# EAGLE board The Flying Jalapeno DUMMY v01 (EAGLE 7.3.0)
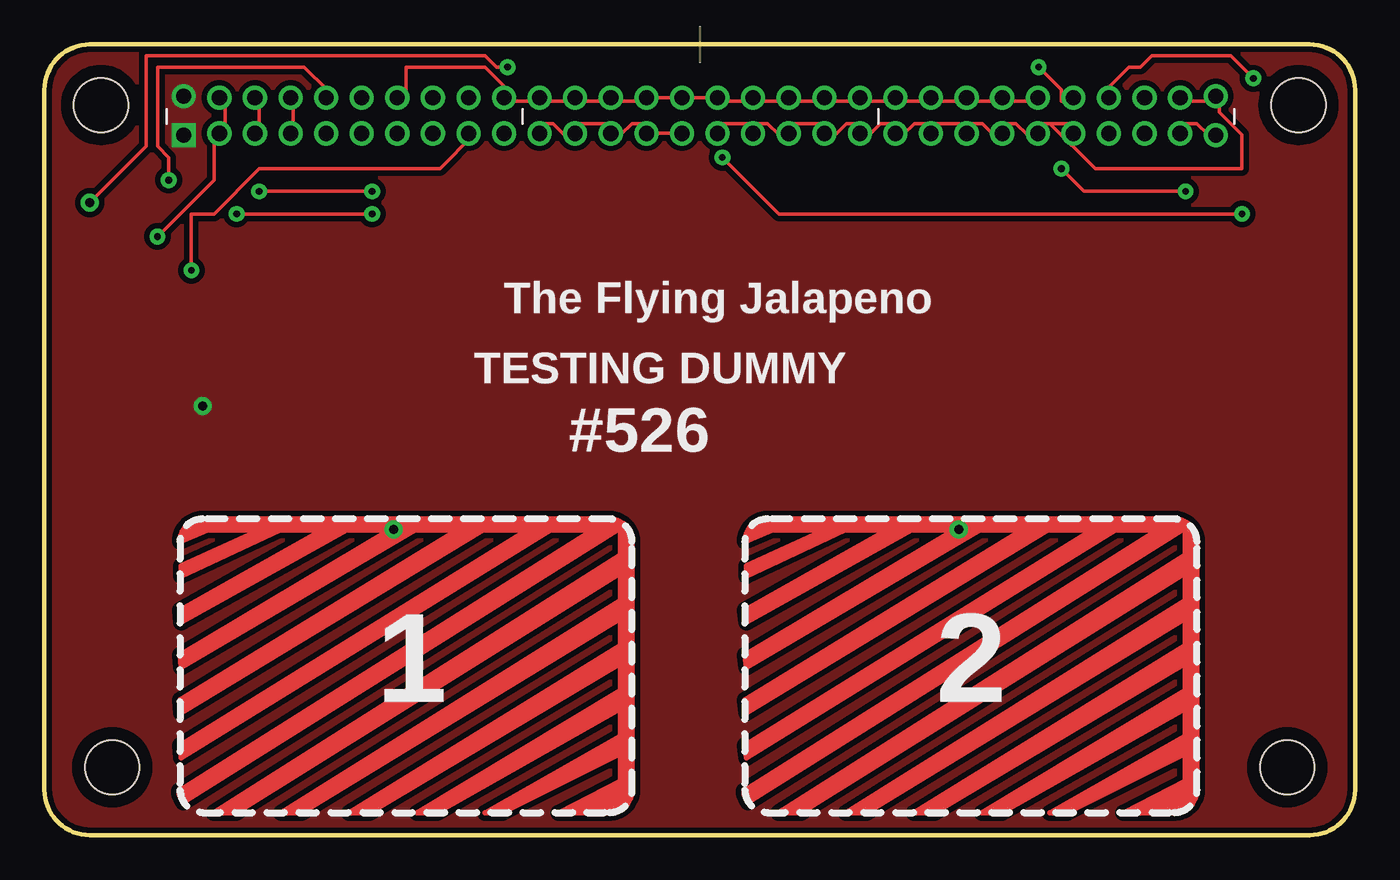
[diagram p0: board, top side]
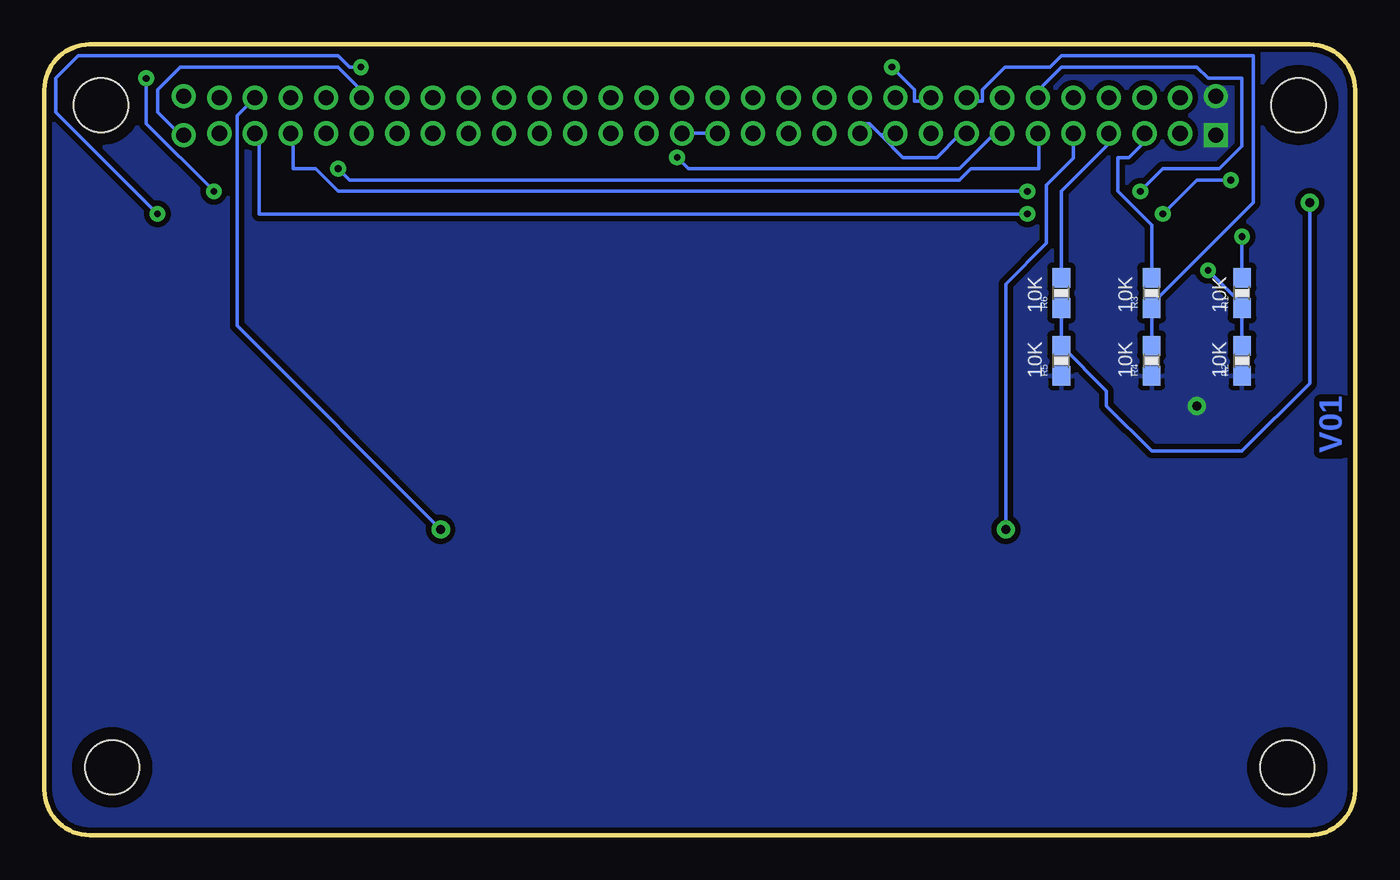
[diagram p1: board, bottom side, seen from below]

Size 73.66 x 44.45 mm. Coordinates in mm from the lower left corner, seen from the top.
Outline: 0,41.91 0,2.54 arc90 2.54,0 71.12,0 arc90 73.66,2.54 73.66,41.91 arc90 71.12,44.45 2.54,44.45 arc90 0,41.91
Copper layers (1*16): Top 0.035mm / dielectric 1.5mm / Bottom 0.035mm
Design rules "SparkFun *": minimum track width 7mil, minimum drill 15mil, track to track 8mil, track to pad 8mil, pad to pad 8mil, via to via 8mil, smd to smd 8mil, copper to edge 8mil, drill to drill 8mil, minimum pad ring 10mil, minimum via ring 10mil, stop-mask expansion 4mil, vias tented up to drill 20mil, thermal gap 10mil
Net classes: 0 default: width 0.203 mm; 8 8_mil: width 0.203 mm, drill 0.381 mm; 9 10_mil: width 0.254 mm, drill 0.381 mm; 10 12_mil: width 0.305 mm, drill 0.381 mm; 11 15_mil: width 0.381 mm, drill 0.381 mm; 12 18_mil: width 0.457 mm, drill 0.508 mm; 13 20_mil: width 0.508 mm, drill 0.508 mm; 14 30_mil: width 0.762 mm, drill 0.508 mm

## Footprints (pad centres in the part's own frame; a part is rotated, then mirrored left to right if it is on the bottom)
CAPSENSE_BUTTON_PADS_ONLY = drill 0.508: CAPSENSE_PAD -0.686,7.036
FLYING_JALAPENO_V2_M = drill 0.85 square: 1 -29,-5.1 | drill 0.85: 2 -27,-5; 3 -25,-5; 4 -23,-5; 5 -21,-5; 6 -19,-5; 7 -17,-5; 8 -15,-5; 9 -13,-5; 10 -11,-5; 11 -9,-5; 12 -7,-5; 13 -5,-5; 14 -3,-5; 15 -1,-5; 16 1,-5; 17 3,-5; 18 5,-5; 19 7,-5; 20 9,-5; 21 11,-5; 22 13,-5; 23 15,-5; 24 17,-5; 25 19,-5; 26 21,-5; 27 23,-5; 28 25,-5; 29 27,-5; 30 29,-5.1; 31 -29,-2.9; 32 -27,-3; 33 -25,-3; 34 -23,-3; 35 -21,-3; 36 -19,-3; 37 -17,-3; 38 -15,-3; 39 -13,-3; 40 -11,-3; 41 -9,-3; 42 -7,-3; 43 -5,-3; 44 -3,-3; 45 -1,-3; 46 1,-3; 47 3,-3; 48 5,-3; 49 7,-3; 50 9,-3; 51 11,-3; 52 13,-3; 53 15,-3; 54 17,-3; 55 19,-3; 56 21,-3; 57 23,-3; 58 25,-3; 59 27,-3; 60 29,-2.9 | hole 3.048: 33.655,-3.404; -33.655,-3.404
0603-RES = smd 1.1 x 1: 1 -0.85,0; 2 0.85,0
STAND-OFF-TIGHT = hole 3.048: 0,0

## Placement (x,y rotation side)
CS1  CAPSENSE_BUTTON_PAD_ONLY  [CAPSENSE_BUTTON_PADS_ONLY]  20.32,10.16 0 top
CS2  CAPSENSE_BUTTON_PAD_ONLY  [CAPSENSE_BUTTON_PADS_ONLY]  52.07,10.16 0 top
JP6  FLYING_JALAPENO_V2MALE  [FLYING_JALAPENO_V2_M]  36.83,44.45 0 top
R1  10K  [0603-RES]  6.35,30.48 90 bottom
R2  10K  [0603-RES]  6.35,26.67 90 bottom
R3  10K  [0603-RES]  11.43,30.48 90 bottom
R4  10K  [0603-RES]  11.43,26.67 90 bottom
R5  10K  [0603-RES]  16.51,26.67 90 bottom
R6  10K  [0603-RES]  16.51,30.48 90 bottom
STANDOFF1  STAND-OFFTIGHT  [STAND-OFF-TIGHT]  3.81,3.81 0 top
STANDOFF2  STAND-OFFTIGHT  [STAND-OFF-TIGHT]  69.85,3.81 0 top

## Library data of the parts
CS1 CS2 JP6 = SparkFun
R1-R6 = SparkFun-Resistors; PROD_ID: RES-00824
STANDOFF1 STANDOFF2 = SparkFun-Electromechanical

## Nets
GND: JP6.1 JP6.31 R2.1 R4.1 R5.1
N$1: JP6.39 R5.2 R6.1
N$2: JP6.4 JP6.34 R6.2
N$3: CS2.CAPSENSE_PAD JP6.58
N$4: CS1.CAPSENSE_PAD JP6.5
N$5: JP6.2 JP6.32 R1.2
N$6: JP6.9 R1.1 R2.2
N$7: JP6.3 JP6.33 R3.2
N$8: JP6.38 R3.1 R4.2
N$9: JP6.28 JP6.35
N$10: JP6.6 JP6.57
N$11: JP6.27 JP6.36
N$12: JP6.7 JP6.56
NET1: JP6.29 JP6.30 JP6.37 JP6.40 JP6.41 JP6.42 JP6.43 JP6.44 JP6.45 JP6.46 JP6.47 JP6.48 JP6.49 JP6.50 JP6.51 JP6.52 JP6.53 JP6.54 JP6.55
NET2: JP6.8 JP6.10 JP6.11 JP6.12 JP6.13 JP6.14 JP6.15 JP6.16 JP6.17 JP6.18 JP6.19 JP6.20 JP6.21 JP6.22 JP6.23 JP6.24 JP6.25 JP6.26 JP6.59 JP6.60

## Tracks (layer width: path | path; a pad name or v marks a point on that pad's centre or on a via)
GND  (via drill 0.51)
  other vias: 8.89,24.13
  pour Bottom (isolate 0.305): 0,0 73.66,0 73.66,44.45 0,44.45
  pour Top (isolate 0.305): 0,0 0,44.45 73.66,44.45 73.66,0
N$1  (via drill 0.38, 0.51)
  Top 0.203: v26.04,43.18 25.4,43.18 24.77,43.82 5.71,43.82 5.71,38.73 v2.54,35.56
  Bottom 0.203: R6.1 R5.2 13.97,24.98 13.97,24.13 11.43,21.59 6.35,21.59 2.54,25.4 v2.54,35.56 | v26.04,43.18 24.77,41.91 24.77,41.28 24.13,41.28 JP6.39
N$2
  Top 0.203: JP6.34 13.97,41.28 13.97,40.01 JP6.4
  Bottom 0.203: R6.2 16.51,36.2 13.34,39.37 JP6.4
N$3
  Bottom 0.203: JP6.58 62.84,40.44 62.84,28.65 CS2.CAPSENSE_PAD
N$4
  Bottom 0.203: JP6.5 15.83,38.07 17.35,36.55 17.35,33.27 19.63,30.99 CS1.CAPSENSE_PAD
N$5  (via drill 0.38)
  Top 0.203: v6.35,33.66 9.53,36.83 9.53,39.37 JP6.2 10.16,40.01 10.16,41.28 JP6.32
  Bottom 0.203: v6.35,33.66 R1.2
N$6  (via drill 0.38)
  Top 0.203: v8.26,31.75 8.26,34.93 9.53,34.93 12.06,37.47 22.23,37.47 24.13,39.37 JP6.9
  Bottom 0.203: R2.2 R1.1 6.35,29.85 v8.26,31.75
N$7
  Top 0.203: JP6.33 12.06,41.28 12.06,40.01 JP6.3
  Bottom 0.203: R3.2 11.43,34.29 13.34,36.2 13.34,38.1 12.7,38.1 11.43,39.37 JP6.3
N$8
  Bottom 0.203: R4.2 R3.1 11.43,29.85 5.71,35.56 5.71,43.82 16.51,43.82 17.14,43.18 19.68,43.18 20.95,41.91 20.95,41.28 21.59,41.28 JP6.38
N$9  (via drill 0.38)
  Top 0.203: v10.79,34.93 v18.41,34.93 | v6.99,36.83 6.99,38.1 6.35,38.73 6.35,43.18 14.61,43.18 15.88,41.91 JP6.35
  Bottom 0.203: v18.41,34.93 61.59,34.93 61.59,39.37 JP6.28 | v10.79,34.93 8.89,36.83 v6.99,36.83
N$10  (via drill 0.38)
  Top 0.203: v57.15,37.47 58.42,36.2 v64.14,36.2 | v67.94,42.55 66.67,43.82 62.23,43.82 61.59,43.18 60.96,43.18 59.69,41.91 JP6.57
  Bottom 0.203: v57.15,37.47 56.52,36.83 22.23,36.83 21.59,37.47 17.78,37.47 17.78,39.37 JP6.6 | v64.14,36.2 67.94,40.01 v67.94,42.55
N$11  (via drill 0.38)
  Top 0.203: v12.06,36.2 v18.41,36.2
  Bottom 0.203: v18.41,36.2 57.15,36.2 58.42,37.47 59.69,37.47 59.69,39.37 JP6.27 | v12.06,36.2 10.79,37.47 7.62,37.47 6.35,38.73 6.35,42.55 8.26,42.55 8.89,43.18 16.51,43.18 17.78,41.91 JP6.36
N$12  (via drill 0.38)
  Top 0.203: v38.1,38.1 41.27,34.93 v67.31,34.93 | v55.88,43.18 57.15,41.91 57.15,41.28 57.78,41.28 JP6.56
  Bottom 0.203: v38.1,38.1 37.47,37.47 22.23,37.47 20.32,39.37 JP6.7 | v67.31,34.93 73.03,40.64 73.03,42.55 71.75,43.82 57.15,43.82 56.52,43.18 v55.88,43.18
NET1
  Top 0.203: JP6.37 20.32,41.91 20.32,43.18 24.77,43.18 26.04,41.91 JP6.40 26.04,41.28 27.3,41.28 JP6.41 27.94,41.28 29.21,41.28 JP6.42 29.84,41.28 31.75,41.28 JP6.43 32.38,41.28 33.66,41.28 JP6.44 JP6.45 JP6.46 38.1,41.28 39.37,41.28 JP6.47 40.01,41.28 41.27,41.28 JP6.48 41.91,41.28 43.81,41.28 JP6.49 44.45,41.28 45.72,41.28 JP6.50 46.35,41.28 47.62,41.28 JP6.51 48.26,41.28 49.53,41.28 JP6.52 50.16,41.28 51.44,41.28 JP6.53 52.07,41.28 53.34,41.28 JP6.54 53.98,41.28 55.24,41.28 JP6.55 | JP6.30 65.41,39.37 64.77,40.01 64.14,40.01 JP6.29
  Bottom 0.203: JP6.30 66.04,39.37 67.31,40.64 67.31,41.91 66.04,43.18 57.15,43.18 55.88,41.91 JP6.55
NET2
  Top 0.203: JP6.11 27.94,40.01 28.57,40.01 29.21,39.37 JP6.12 29.84,40.01 31.75,40.01 JP6.13 32.38,39.37 33.02,40.01 33.66,40.01 JP6.14 JP6.15 | 40.01,40.01 38.1,40.01 JP6.16 | 40.01,40.01 40.64,40.01 41.27,39.37 JP6.18 41.91,40.01 43.81,40.01 JP6.19 44.45,39.37 45.09,40.01 45.72,40.01 JP6.20 46.35,39.37 46.99,40.01 47.62,40.01 JP6.21 48.26,39.37 48.9,40.01 49.53,40.01 JP6.22 50.16,40.01 51.44,40.01 JP6.23 52.07,40.01 52.7,40.01 53.34,39.37 JP6.24 53.98,40.01 54.61,40.01 55.24,39.37 JP6.25 55.88,40.01 56.52,40.01 | 40.01,40.01 JP6.17 | JP6.59 64.14,41.28 65.41,41.28 JP6.60 66.04,41.28 66.04,40.64 67.31,39.37 67.31,37.47 59.05,37.47 56.52,40.01 | 56.52,40.01 57.78,40.01 JP6.26
  Bottom 0.203: 26.67,39.37 27.3,40.01 27.94,40.01 JP6.11 | 26.67,39.37 25.4,38.1 23.5,38.1 22.23,39.37 JP6.8 | 26.67,39.37 26.04,39.37 JP6.10 | JP6.16 JP6.15

## Text on the board
Bottom: V01
tPlace: The Flying Jalapeno | TESTING DUMMY | #526 | 1 | 2
bPlace: 10K | 10K | 10K | 10K | 10K | 10K